# Altium PCB PreCharge.PcbDoc
Units mm, origin at the board's own origin, x right, y up, seen from the top; angles counter-clockwise.
Board outline 50 x 50 mm, 4 copper layers (Top Layer, Internal Plane 1, Internal Plane 2, Bottom Layer), stack 0.462 mm thick; 58 components, 33 nets, 166 pads, 16 vias.
Unrouted connection lines stored in the file: 2.
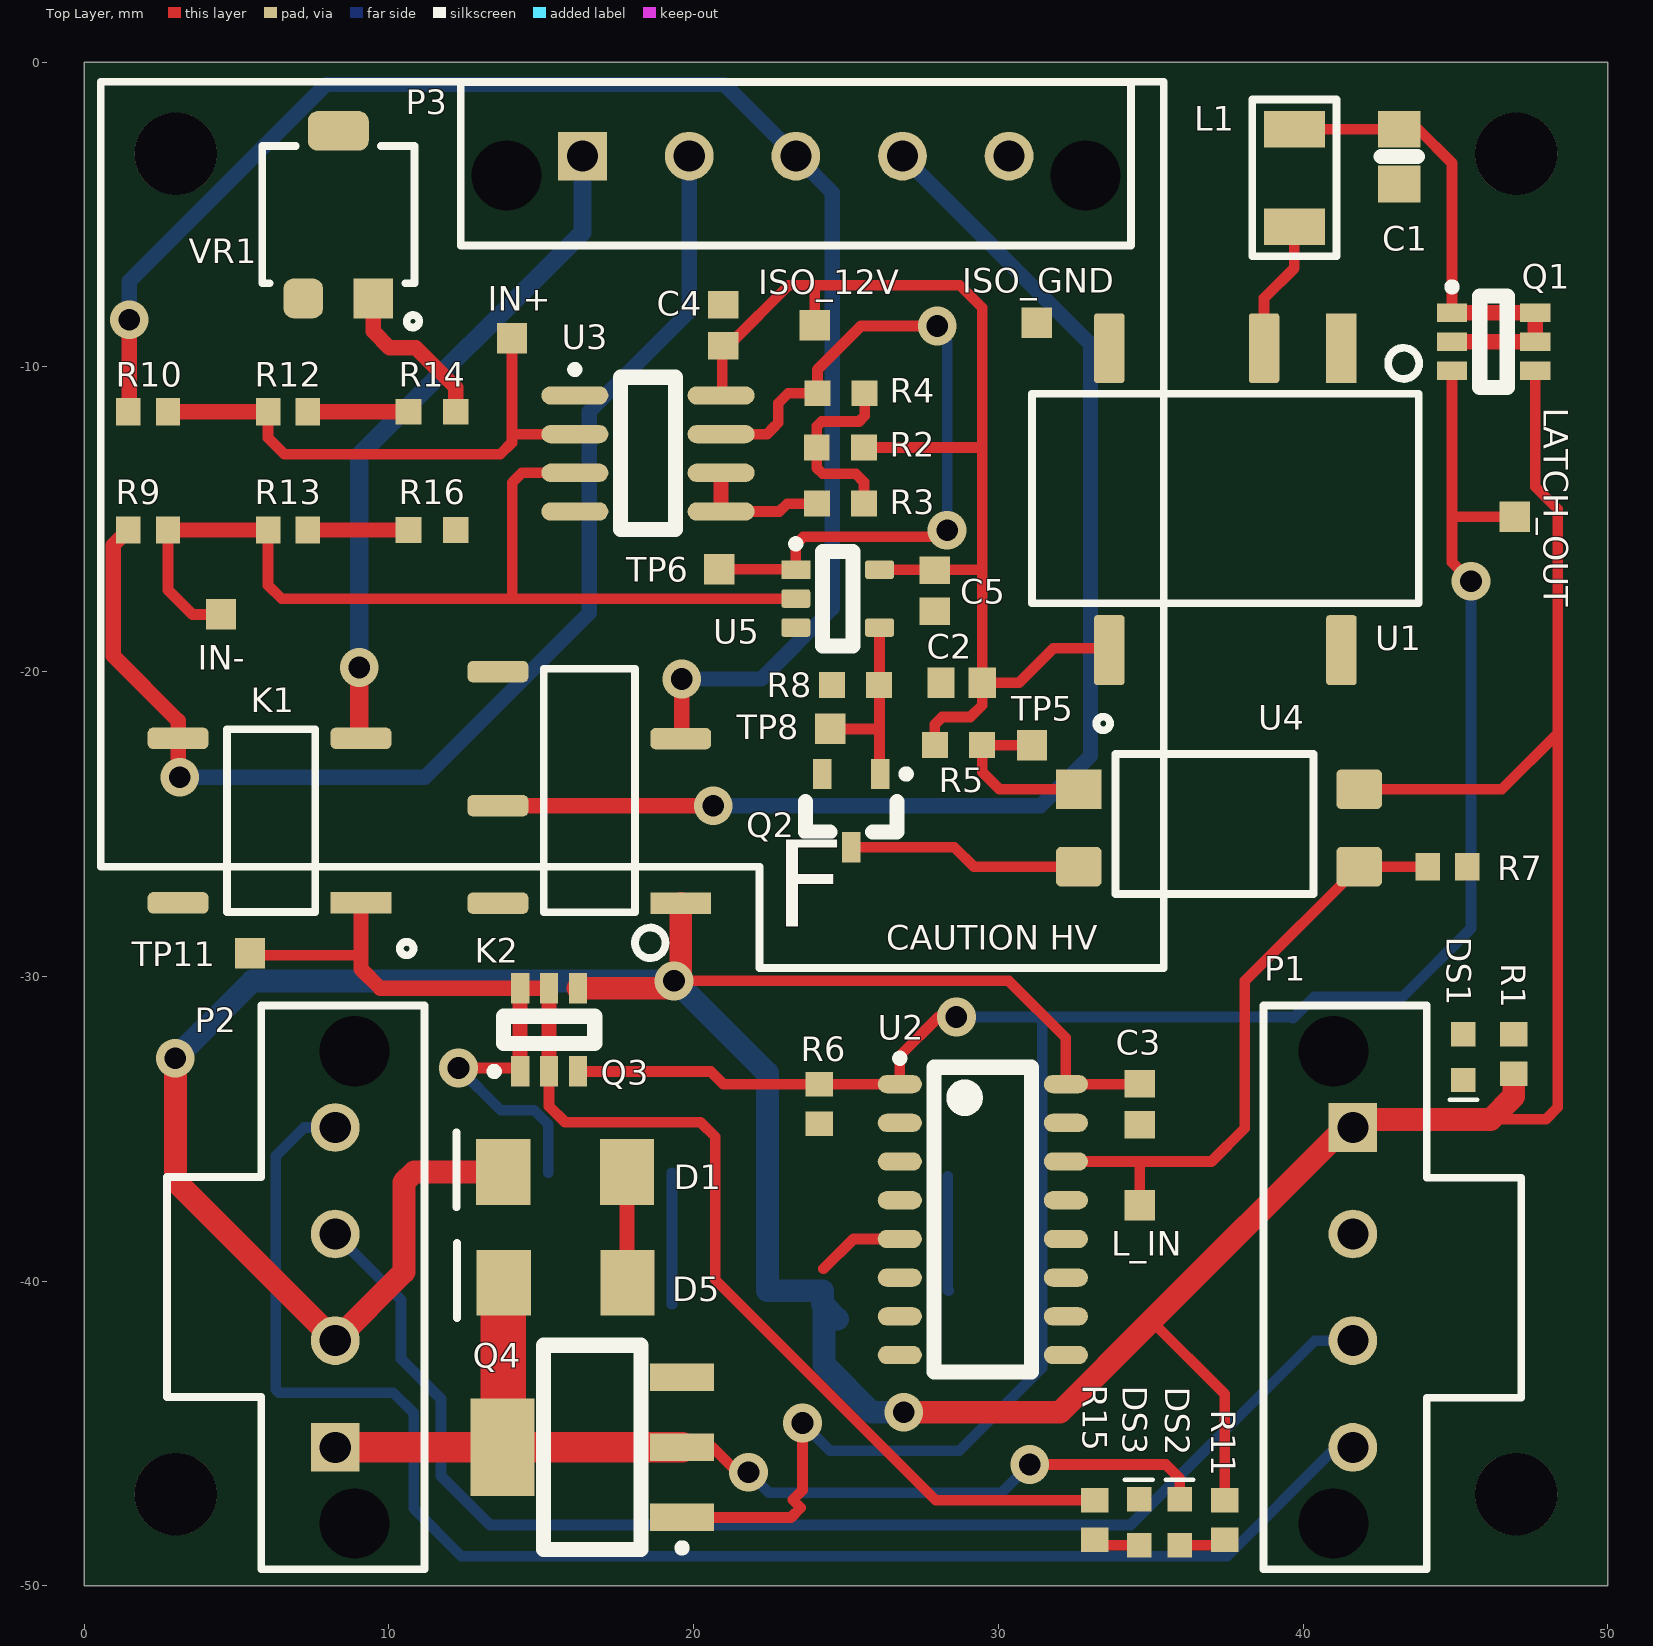
[diagram p0: Top Layer view]
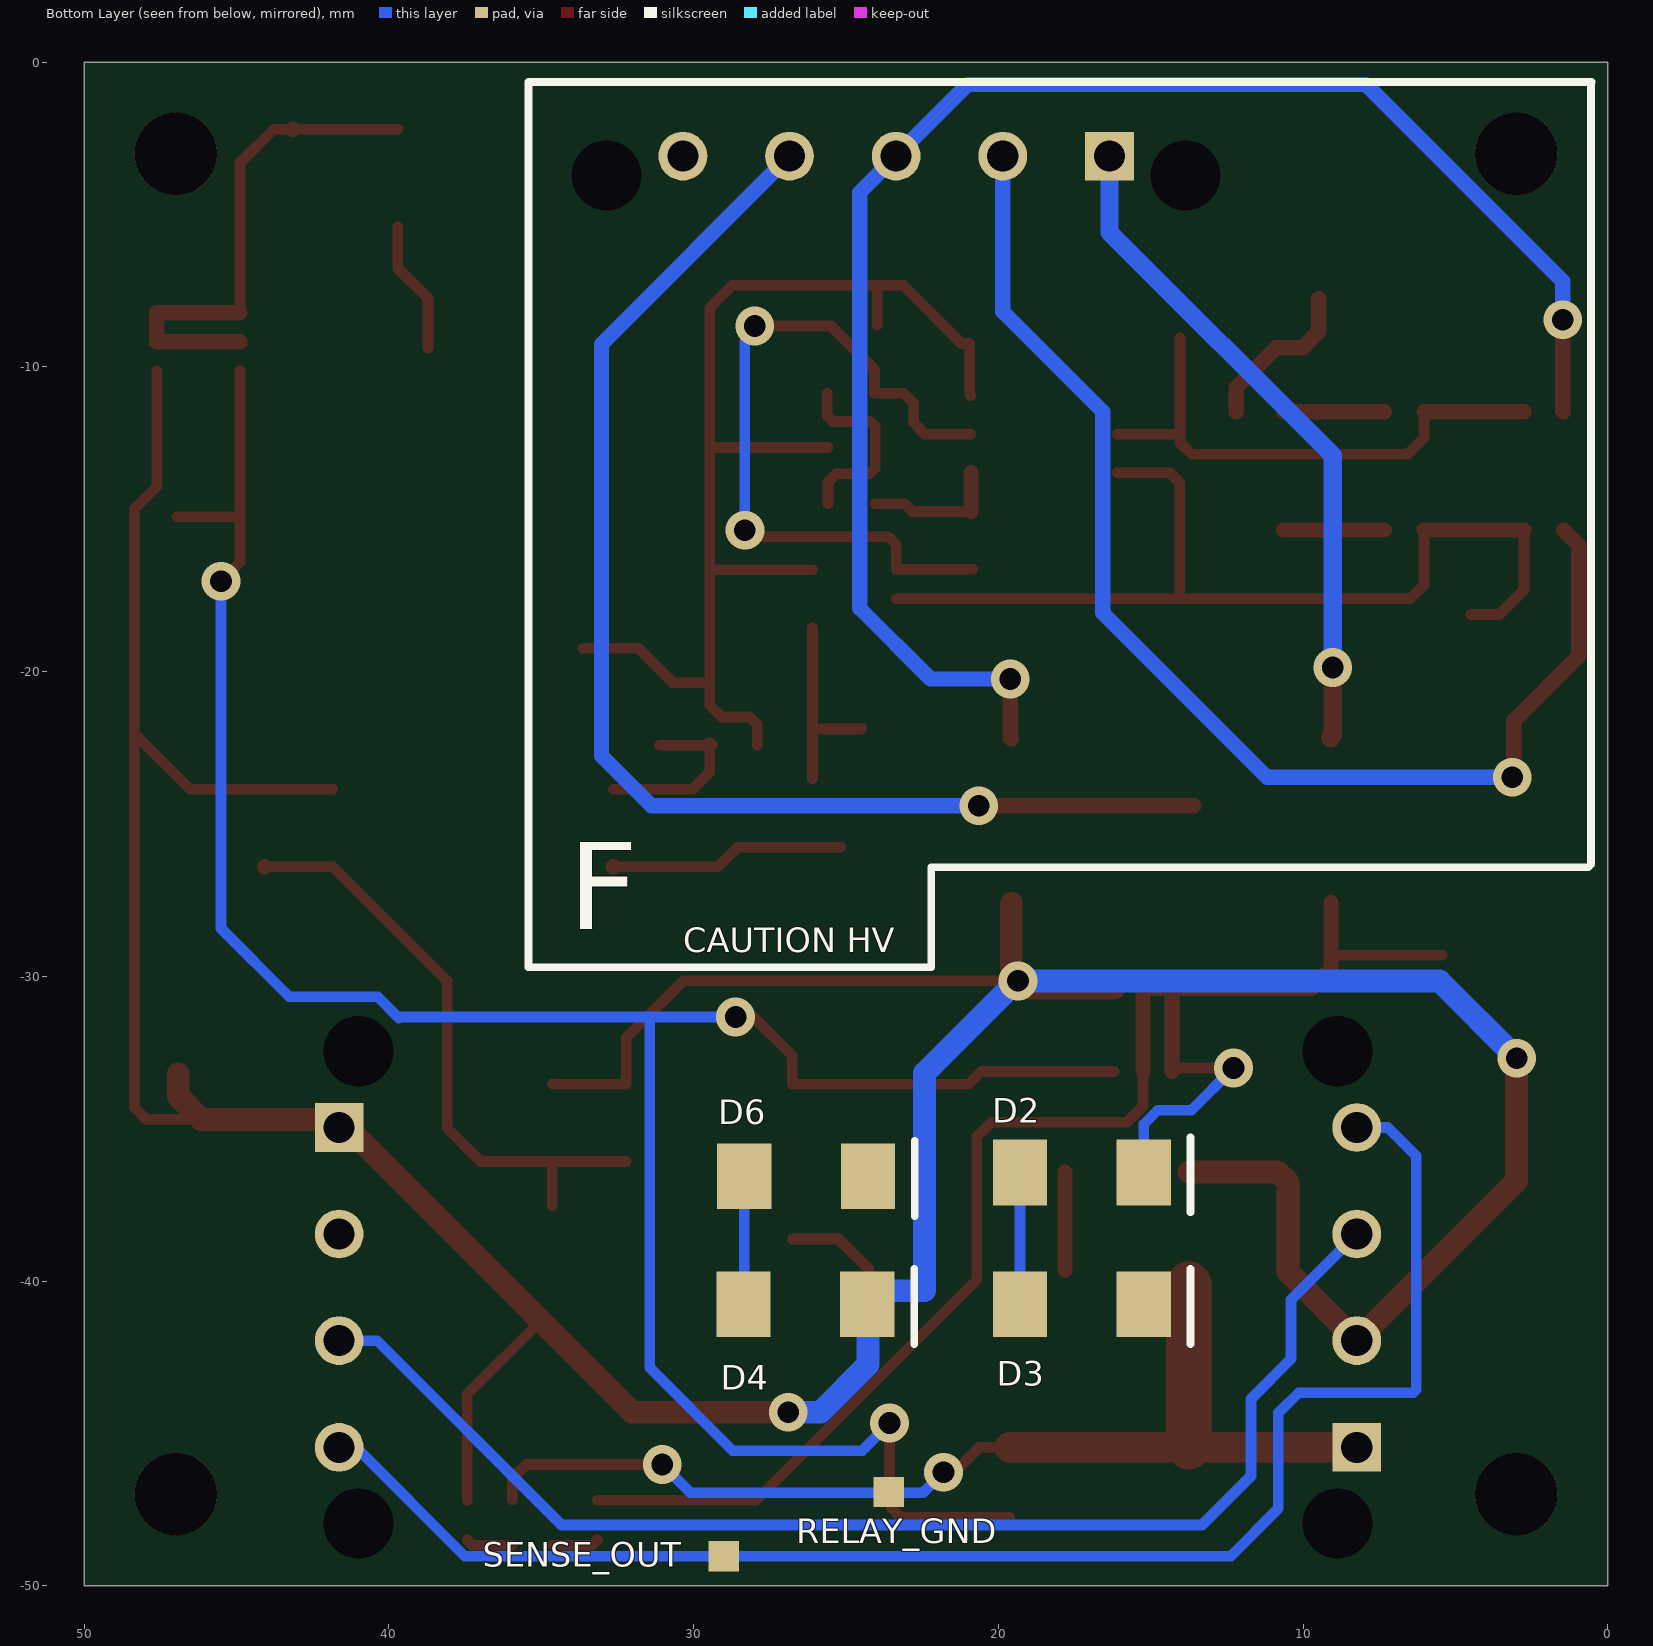
[diagram p1: Bottom Layer view, seen from below]
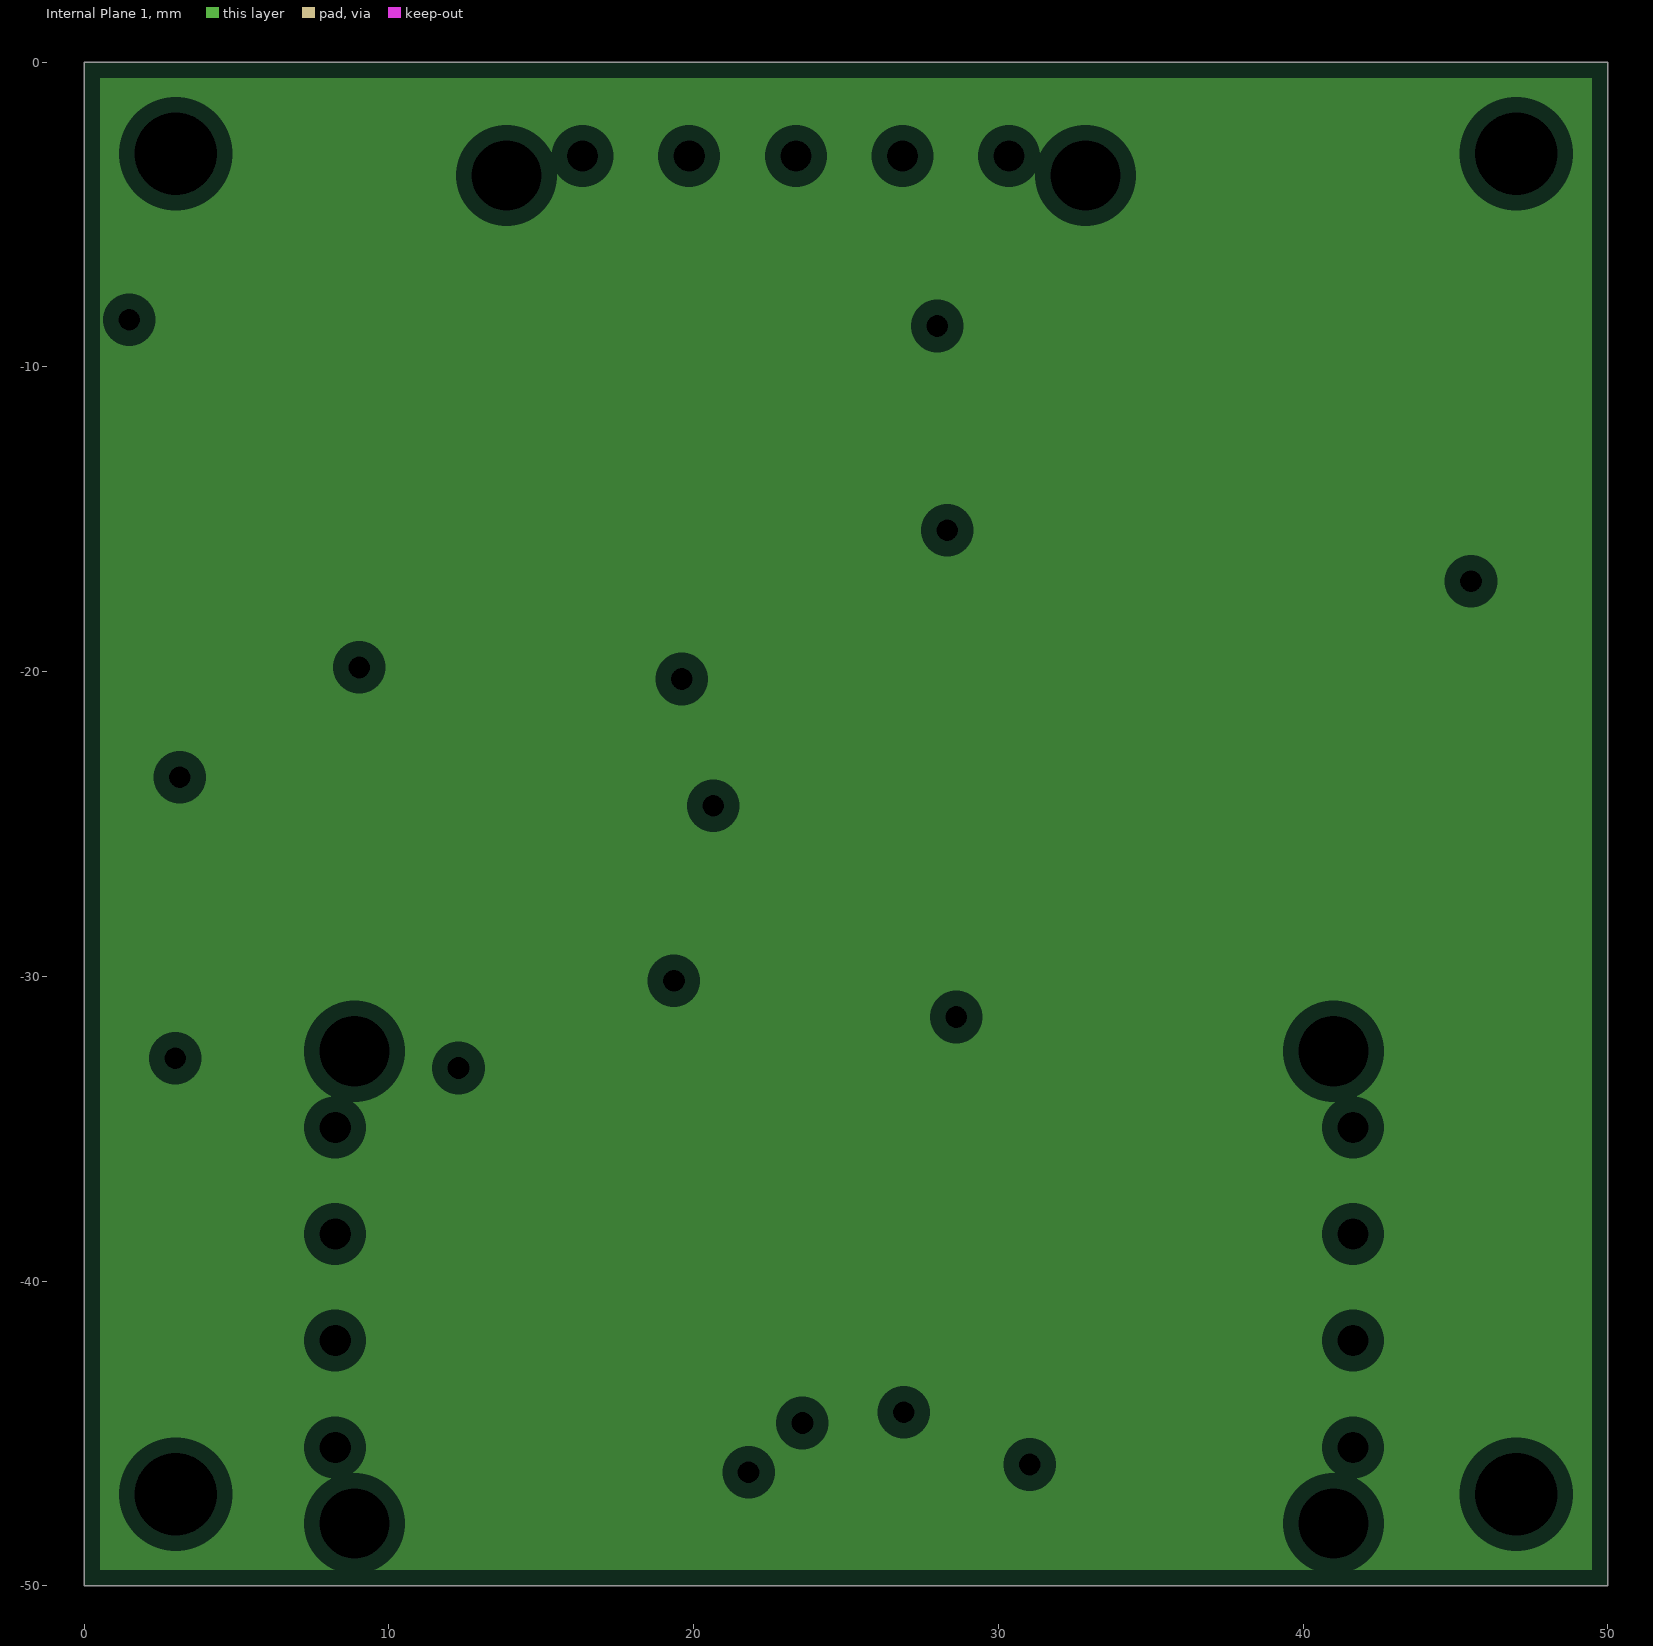
[diagram p2: Internal Plane 1, clearances drawn from the general rule]
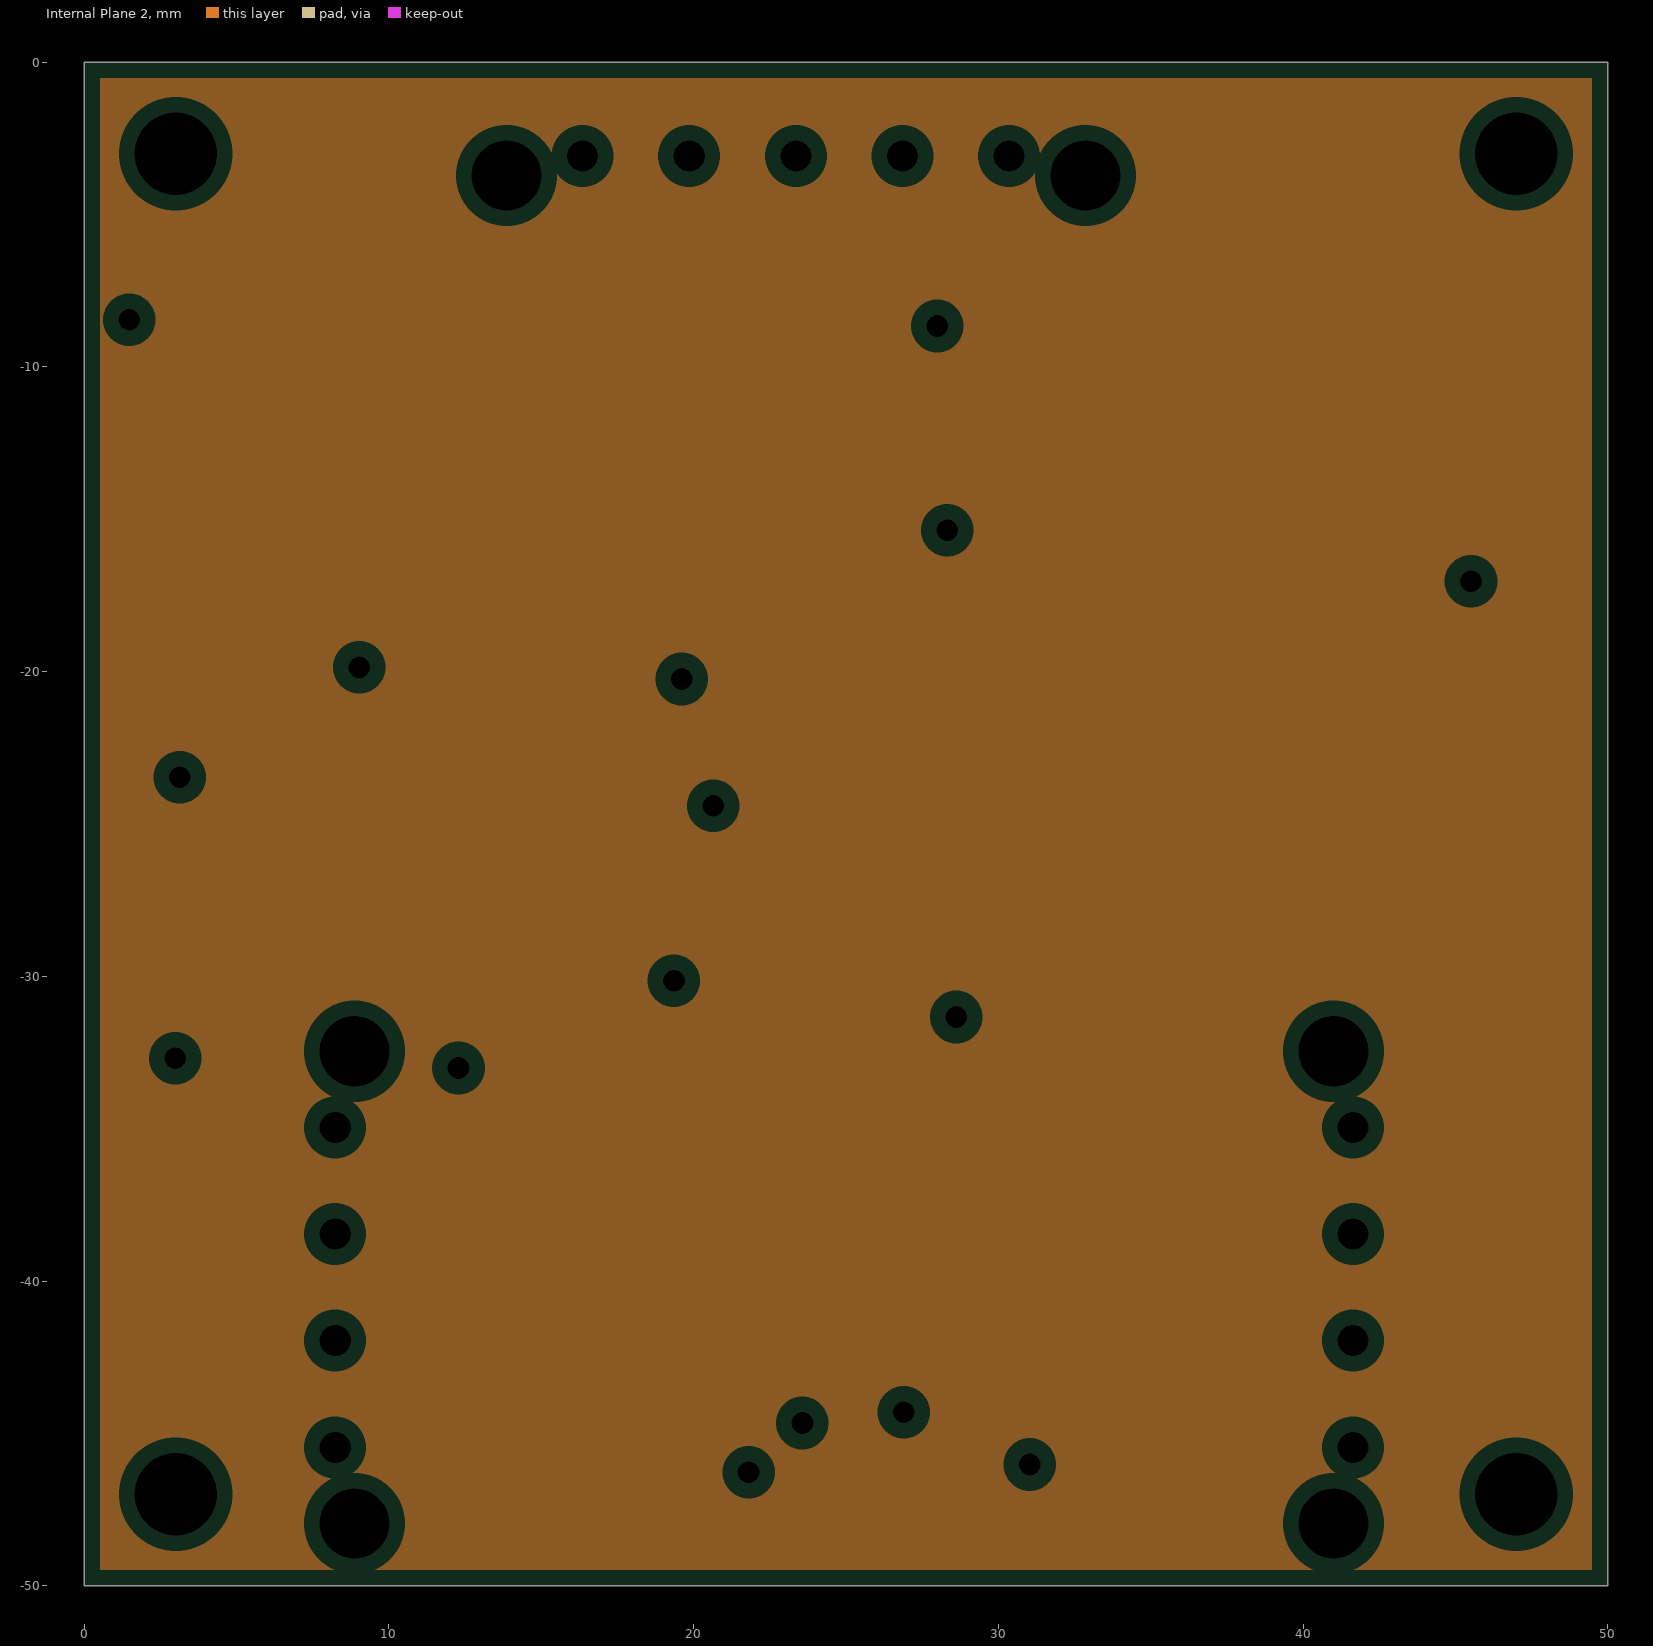
[diagram p3: Internal Plane 2, clearances drawn from the general rule]
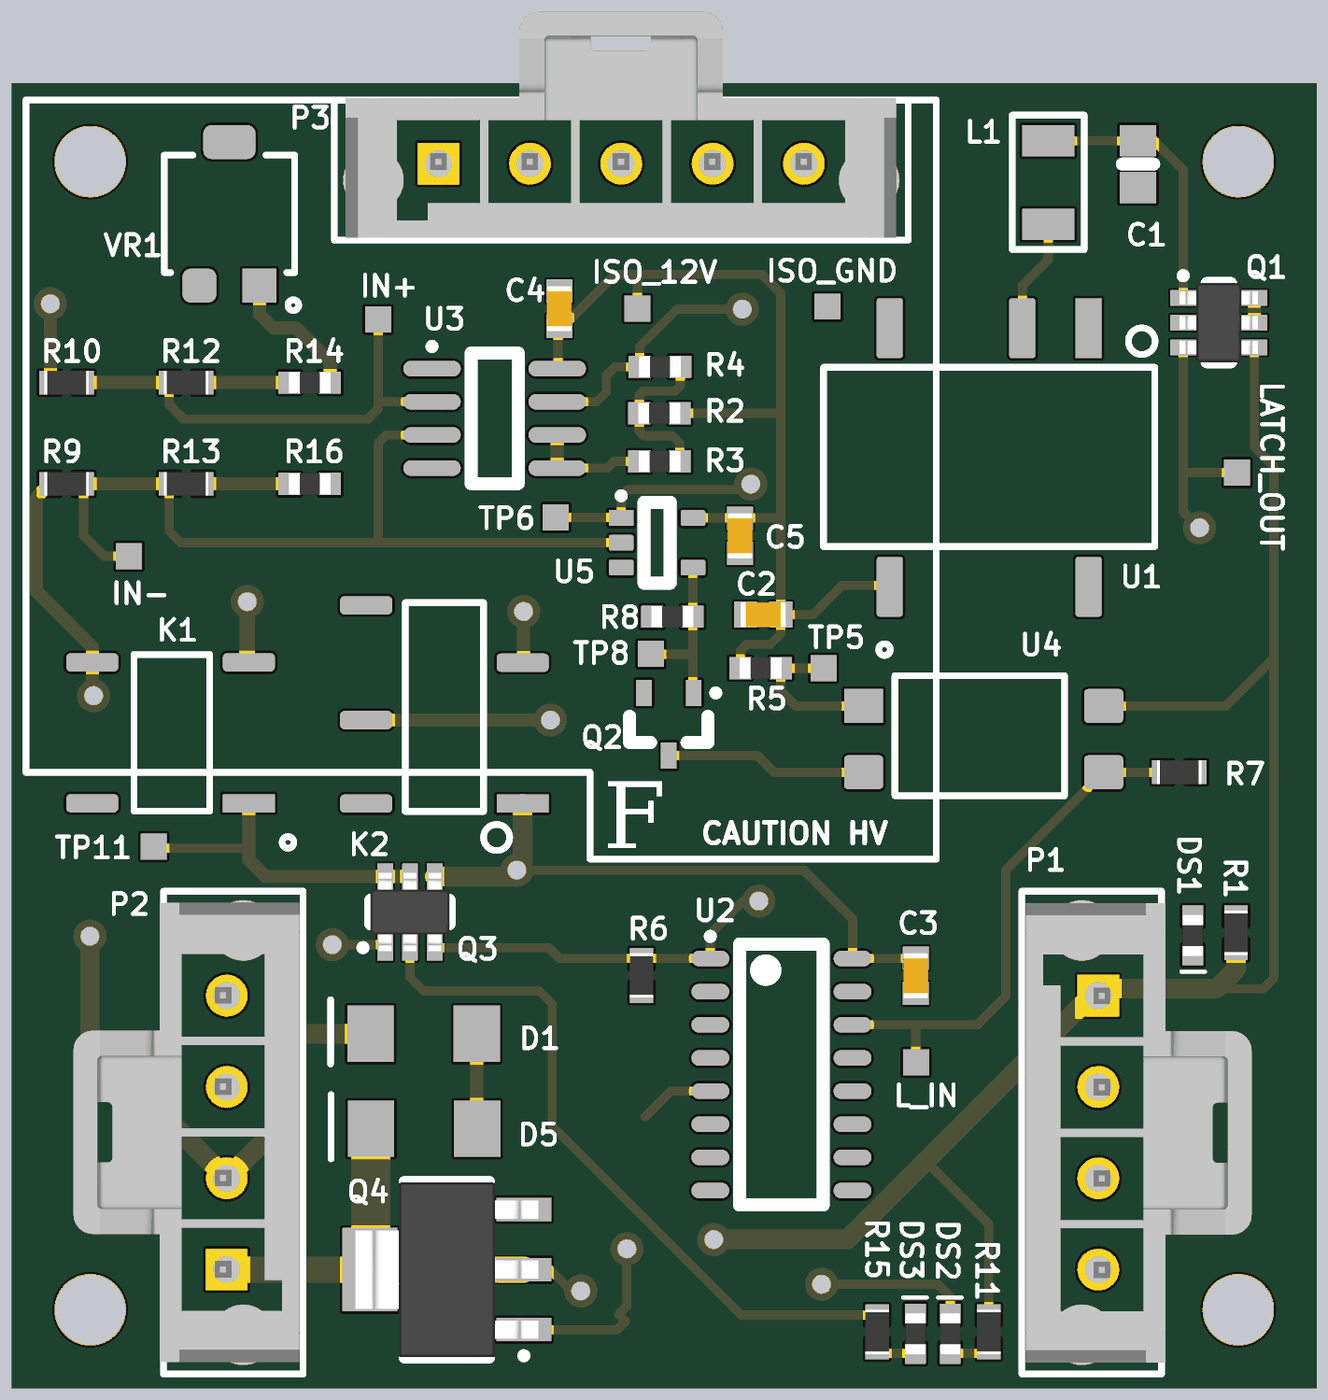
[diagram p4: 3D render of the assembled board from above, using the file's embedded part models]

## Layer stack, top to bottom
Top Solder: solder mask 0.0102, Solder Resist, Dk 3.5
Top Layer: signal copper 0.0356
Internal Plane 1: plane copper 0.0356
Internal Plane 2: plane copper 0.0356
Dielectric 1: dielectric 0.32, FR-4, Dk 4.8
Bottom Layer: signal copper 0.0356
Bottom Solder: solder mask 0.0102, Solder Resist, Dk 3.5

## Board outline
0,-50 50,-50 50,0 0,0

## Design rules (kind name [scope] priority, off if disabled: settings)
Clearance Clearance_1 [InPolygon and InNet('ISO_GND') vs InNet('TO DISCHARGE RESISTOR') or InNet('PRECHARGEIN')or InNet('PRECHARGEOUT') or InNet('BAT_IN')] p1: gap=0.5
Clearance [All] p2: gap=0.2 except(0.3: Poly-Poly Poly-Region Poly-Text)
MinimumSolderMaskSliver [All] p1: minsoldermaskwidth=0.3
PlaneClearance [All] p1: clearance=0.508
PlaneConnect [All] p1: planeconnectstyle=Relief reliefexpansion=0.508 reliefentries=4 reliefconductorwidth=0.254 reliefairgap=0.254
PolygonConnect [All] p1: connectstyle=Relief reliefconductorwidth=0.254 reliefentries=4 polygonreliefangle="90 Angle" airgapwidth=0.254
RoutingVias [All] p1: holewidth=0.3 width=1 viastyle="Through Hole" minholewidth=0.711 minwidth=1.27 maxholewidth=0.711 maxwidth=1.27
SolderMaskExpansion [All] p1: expansion=0.102
Width [All] p1: maxlimit=1.5 minlimit=0.2 preferedwidth=0.35
27 further rules are at their usual default settings.

## Components (designator, comment, footprint, x,y, rotation, side; value= is the part's Value field where it differs from the comment)
C1 "4.7uF" 0805 43.156,-3.091 r90 top
C2 "2.2uF" CAPC1608X06N 28.793,-20.362 r0 top
C3 "0.1uF" CAPC1608X06N 34.641,-34.196 r90 top
C4 "0.1uF" CAPC1608X06N 20.976,-8.633 r270 top
C5 "0.1uF" CAPC1608X06N 27.906,-17.34 r90 top
D1 "Diode" "DO-214AA DIODE" 17.813,-36.421 r180 top
D2 "Diode" "DO-214AA DIODE" 19.291,-36.442 r180 bottom
D3 "Zener Diode" "DO-214AA DIODE" 19.291,-40.763 r180 bottom
D4 "Diode" "DO-214AA DIODE" 28.364,-40.763 r180 bottom
D5 "Zener Diode" "DO-214AA DIODE" 17.831,-40.058 r180 top
D6 "Zener Diode" "DO-214AA DIODE" 28.342,-36.561 r180 bottom
DS1 "LED BLUE" LED_0603 45.246,-31.954 r270 top
DS2 "LED_GREEN" LED_0603 35.97,-48.619 r90 top
DS3 "LED_RED" LED_0603 34.636,-48.619 r90 top
IN+ "Test Point" "TEST POINT" 14.037,-9.049 r90 top (schematic designator TP7)
IN- "Test Point" "TEST POINT" 4.486,-18.121 r90 top (schematic designator TP9)
ISO_12V "Test Point" "TEST POINT" 23.971,-8.628 r90 top (schematic designator TP1)
ISO_GND "Test Point" "TEST POINT" 31.254,-8.553 r90 top (schematic designator TP2)
K1 "Relay-SPST" RELAY-SPST 9.08,-27.588 r90 top
K2 "Relay-SPDT" RELAY_SPDT 13.576,-24.4 r90 top
L1 "6.8uH" "NLFV32T-6R8M-EF/IND 6.8UH" 39.718,-2.198 r270 top
L_IN "Test Point" "TEST POINT" 34.649,-37.517 r270 top (schematic designator TP4)
LATCH_OUT "Test Point" "TEST POINT" 46.952,-14.917 r90 top (schematic designator TP3)
P1 "4POS ULTRA-FIT KEY-B" "4 POS ULTRA-FIT" 41.635,-40.209 r270 top
P2 "4POS ULTRA-FIT KEY-A" "4 POS ULTRA-FIT" 8.235,-40.209 r90 top
P3 "HV Connector" "5 POS ULTRA-FIT" 13.854,-3.709 r0 top
Q1 "MOSFET-P" P-MOSFET 46.255,-9.17 r0 top
Q2 "MOSFET-N" "N-CH MOSFET SOT-23" 25.174,-24.559 r270 top
Q3 "MOSFET-P" P-MOSFET 15.254,-31.757 r90 top
Q4 "N-MOSFET" "BUK9880 N-MOSFET 7A" 16.67,-45.46 r180 top
R1 "2K" RES_0603 46.918,-32.553 r270 top
R2 "100R" RESC1608X06N 24.815,-12.644 r0 top
R3 "33K" RESC1608X06N 24.818,-14.486 r180 top
R4 "6.8k" RESC1608X06N 24.838,-10.863 r0 top
R5 "820 Ohm" RESC1608X06N 28.693,-22.41 r180 top
R6 "10K" RES_0603 24.127,-34.189 r90 top
R7 "10K" RES_0603 44.74,-26.397 r180 top
R8 "10K" RESC1608X06N 25.311,-20.435 r0 top
R9 "470K" RES_0603 2.097,-15.349 r180 top
R10 "470K" RES_0603 2.097,-11.469 r180 top
R11 "2K" RES_0603 37.437,-47.846 r270 top
R12 "33K" RES_0603 6.681,-11.469 r180 top
R13 "33K" RES_0603 6.681,-15.349 r180 top
R14 "0R" RESC1608X06N 11.415,-11.469 r180 top
R15 "2K" RES_0603 33.159,-47.846 r270 top
R16 "0R" RESC1608X06N 11.415,-15.349 r180 top
RELAY_GND "Test Point" "TEST POINT" 23.594,-46.925 r90 bottom (schematic designator TP12)
SENSE_OUT "Test Point" "TEST POINT" 29.007,-49.033 r90 bottom (schematic designator TP10)
TP5 "Test Point" "TEST POINT" 31.105,-22.411 r90 top
TP6 "Test Point" "TEST POINT" 20.846,-16.634 r90 top
TP8 "Test Point" "TEST POINT" 24.483,-21.867 r270 top
TP11 "Test Point" "TEST POINT" 5.438,-29.248 r90 top
U1 "12V-12V Isolated DCDC" "1470-2950-1-ND/ISOLATED DCDC" 41.262,-10.532 r180 top
U2 "SR LATCH" CD4043BDR-16SOIC 29.491,-37.984 r0 top
U3 "COMPARATOR" SOIC8 18.494,-12.868 r0 top
U4 "OPTOISOLATOR" "FOD817DS OPTOISOLATOR" 41.842,-26.4 r90 top
U5 "AND Gate" "2-INPUT AND GATE" 24.727,-17.604 r0 top
VR1 "2k 0.25W Pot" "20K POT" 8.336,-2.25 r270 top

## Footprints (in the part's own frame and the unit in brackets; to place one, negate y for a bottom-side part, rotate by r counter-clockwise, add the part's x,y. Pads: shape width x height; smd on the part's side, far side on the other; paste and mask are expansions set on the pad)
"2-INPUT AND GATE" [mm] "IC GATE AND 1CH 2-INP 5-SSOP"
  rect 0.95x0.6 smd: 1(-1.375,0.95)
  rrect25% 0.95x0.6 smd: 2(-1.375,0) 3(-1.375,-0.95) 4(1.375,-0.95) 5(1.375,0.95)
  silkscreen extent -1.5,-1.55 0.5,1.92, body extent -0.9,-1.55 0.9,1.55, height 1.25
"4 POS ULTRA-FIT" [mm]
  rect 1.6x1.6 hole 1.02: 1(-5.25,0)
  round 1.6 hole 1.02: 2(-1.75,0) 3(1.75,0) 4(5.25,0)
  round 0 hole 2.3: ""(-7.75,-0.63) ""(7.75,-0.63)
  silkscreen extent -9.25,-2.93 9.25,5.53, body extent -8.79,-2.78 8.81,5.88, height 8.05
"5 POS ULTRA-FIT" [mm]
  rect 1.6x1.6 hole 1.02: 1(2.5,0.63)
  round 1.6 hole 1.02: 2(6,0.63) 3(9.5,0.63) 4(13,0.63) 5(16.5,0.63)
  round 0 hole 2.3: ""(0,0) ""(19,0)
  silkscreen extent -1.5,-2.3 20.5,3.05, body extent -1.06,-2.21 20.04,6.45, height 8.05
"20K POT" [mm]
  rect 1.3x1.3 smd: 1(5.5,1.15)
  rrect50% 1.3x2 smd: 2(0,0)
  rrect50% 1.3x1.3 smd: 3(5.5,-1.15)
  silkscreen extent 0.5,-2.5 6.46,2.66
0805 [mm]
  rect 1.2x1.4 smd: 1(-0.903,-0.001) 2(0.897,-0.001)
  silkscreen extent 0,-0.6 0,0.6, body extent -1.08,-0.7 1.07,0.7, height 0.7
"1470-2950-1-ND/ISOLATED DCDC" [mm]
  rect 1x2.29 smd: 1(0,-1.15)
  rrect20% 1x2.29 smd: 2(2.54,-1.15) 4(7.62,-1.15) 5(7.62,8.76) 8(0,8.76)
  silkscreen extent -2.55,-1.16 10.16,7.22, body extent -2.54,0.35 10.16,7.22, height 7
"BUK9880 N-MOSFET 7A" [mm] "SOT223, 4-Leads, Body 6.50x7.00mm (avg), Pitch 2.30mm, IPC Medium Density"
  rect 2.1x0.9 smd: 1(-2.95,2.3) 2(-2.95,0) 3(-2.95,-2.3)
  rect 2.1x3.2 smd: 4(2.95,0)
  silkscreen extent -3.08,-3.35 1.6,3.42, body extent -3.5,-3.35 3.5,3.35, height 1.8
CAPC1608X06N [mm] "Chip Capacitor, 2-Leads, Body 1.60x0.81mm, IPC Medium Density"
  rect 0.9x1 smd mask+0.076: 1(-0.675,0) 2(0.675,0)
  body extent -0.87,-0.48 0.87,0.48, height 0.9
CD4043BDR-16SOIC [mm] "SR LATCH"
  oval 1.45x0.6 smd: 1(-2.725,4.445) 2(-2.725,3.175) 3(-2.725,1.905) 4(-2.725,0.635) 5(-2.725,-0.635) 6(-2.725,-1.905) 7(-2.725,-3.175) 8(-2.725,-4.445) 9(2.725,-4.445) 10(2.725,-3.175) 11(2.725,-1.905) 12(2.725,-0.635) 13(2.725,0.635) 14(2.725,1.905) 15(2.725,3.175) 16(2.725,4.445)
  silkscreen extent -2.85,-5 1.6,5.42, body extent -2,-5 2,5, height 1.75
"DO-214AA DIODE" [mil] "Zener Diode 16V 5W SMBJ5353B-TP"
  rect 70x85 smd: 1(0,0) 2(160,0)
  silkscreen extent 220,-51 220,46
"FOD817DS OPTOISOLATOR" [mm]
  rect 1.3x1.5 smd: 1(2.54,9.2)
  rrect25% 1.3x1.5 smd: 2(0,9.2) 3(0,0) 4(2.54,0)
  silkscreen extent -0.9,1.5 4.92,8.62, body extent -0.9,1.5 3.7,8, height 3.5
LED_0603 [mm]
  rect 0.8x0.8 smd: 1(-0.05,0.01) 2(1.45,0.01)
  silkscreen extent 2.09,-0.43 2.09,0.48, body extent -0.1,-0.39 1.5,0.41, height 0.55
"N-CH MOSFET SOT-23" [mm] "SI2318CDS-T1-GE3CT-ND"
  rect 1x0.6 smd: 1(-1.2,0.95) 2(-1.2,-0.95) 3(1.2,0)
  silkscreen extent -1.32,-1.5 0.7,1.93, body extent -0.7,-1.52 0.7,1.52, height 1.12
"NLFV32T-6R8M-EF/IND 6.8UH" [mm]
  rect 1.2x2 smd: 1(0,0) 2(3.2,0)
  silkscreen extent -0.98,-1.38 4.17,1.38, body extent -0.98,-1.38 4.17,1.38, height 2.2
P-MOSFET [mm] "SOT23, 6-Leads, Body 2.93x2.80mm, Pitch 0.95mm, IPC Medium Density"
  rect 1x0.6 smd mask+0.076: 1(-1.365,0.95) 2(-1.365,0) 3(-1.365,-0.95) 4(1.365,-0.95) 5(1.365,0) 6(1.365,0.95)
  silkscreen extent -1.49,-1.5 0.45,1.92, body extent -1.5,-1.52 1.5,1.52, height 1.25
RELAY-SPST [mm]
  rect 0.7x2 smd: 1(0,0)
  rrect50% 0.7x2 smd: 3(5.4,0) 6(5.4,6) 8(0,6)
  silkscreen extent -1.72,-1.72 5.7,4.4, body extent -0.3,1.5 5.7,4.4, height 5.65
RELAY_SPDT [mm]
  rect 0.7x2 smd: 1(-3.2,-6)
  rrect50% 0.7x2 smd: 3(2.2,-6) 5(4.4,0) 7(0,0) 8(-3.2,0)
  silkscreen extent -5,-5.5 4.5,-1.5, body extent -3.5,-4.5 4.5,-1.5, height 5.65
RES_0603 [mm] "Chip Resistor, 2-Leads, Body 1.60x0.80mm, IPC Medium Density"
  rect 0.8x0.9 smd: 1(-0.65,0) 2(0.65,0)
  body extent -0.85,-0.45 0.85,0.45, height 0.5
RESC1608X06N [mm] "Chip Resistor, 2-Leads, Body 1.60x0.80mm, IPC Medium Density"
  rect 0.85x0.85 smd: 1(-0.775,0) 2(0.775,0)
  body extent -0.8,-0.4 0.8,0.4, height 0.55
SOIC8 [mm]
  oval 2.2x0.6 smd: 1(-2.394,1.935) 2(-2.394,0.665) 3(-2.394,-0.605) 4(-2.394,-1.875) 5(2.406,-1.875) 6(2.406,-0.605) 7(2.406,0.665) 8(2.406,1.935)
  silkscreen extent -2.52,-2.47 0.91,2.91, body extent -1.99,-2.47 2.01,2.53, height 1.75
"TEST POINT" [mm]
  rect 1x1 smd: TP(0,0)

## Part data
C1: library part "CAP CER 4.7UF 25V 10% X5R 0603", "4.7µF ±10% 50V Ceramic Capacitor X5R 0805 (2012 Metric)"
C2: library part "CAP CER 2.2UF 25V 10% 0603", "CAP CER 2.2UF 50V X5R 0603"
C3 C4 C5: library part "CAP CER 0.1UF 50V 10% X7R 0603", "0.10µF ±10% 50V Ceramic Capacitor X7R 0603 (1608 Metric)"
D1 D2 D4: "Diode Schottky 40V 3A Surface Mount DO-214AA (SMB)"
D3 D5 D6: "Zener Diode 16V 5W ±5% Surface Mount DO-214AA (SMB)"
DS1: library part LED_BLUE, "LED BLUE CLEAR 0603 SMD"
DS2: "LED GREEN CLEAR 0603 SMD"
DS3: "Red LED 0603"
K1: "Telecom Relay SPST-NO (1 Form A) Surface Mount"
K2: "Telecom Relay SPDT (1 Form C) Surface Mount"
L1: library part "IND 6.8uH", "6.8µH Shielded Wirewound Inductor 260mA 204 mOhm Max 1210 (3225 Metric)"
P1 P2: library part "4 Position Vertical Ultra-Fit", "4 Positions Header Connector 0.138\" (3.50mm) Through Hole Tin"
P3: library part "5 Position Vertical Ultra-Fit", "5 Positions Header Connector 0.138\" (3.50mm) Through Hole Tin"
Q1 Q3: "MOSFET P-CH 30V 4A SOT23-6"
Q2: "MOSFET N-CH 50V 200MA SOT23-3"
Q4: library part "MOSFET-N High Current", "MOSFET N-CH 55V 7A SOT223"
R1 R5 R11 R15: library part "RES SMD 820 OHM 5% 1/4W 0603", "RES SMD 820 OHM 5% 1/4W 0603"
R2: library part "RES 6.8k OHM 1% 1/10W 0603 SMD", "RES SMD 100 OHM 1% 1/10W 0603"
R3 R12 R13: library part "RES 33K OHM 1% 1/4W 0603", "RES 33K OHM 1% 1/4W 0603"
R4: library part "RES 6.8k OHM 1% 1/10W 0603 SMD", "RES SMD 6.8K OHM 1% 1/10W 0603"
R6 R7 R8: library part "RES SMD 10K OHM 1% 1/10W 0603", "RES SMD 10K OHM 1% 1/10W 0603"
R9 R10: library part "RES 470K OHM 1% 1/4W 0603", "RES SMD 470K OHM 1% 1/4W 0603"
R14 R16: library part "RES 0.0 OHM 1/4W 0603", "RES SMD 0.0 OHM JUMPER 1/4W 0603"
U1: library part "12V 84mA Isolated DC/DC", "Isolated Module DC DC Converter 1 Output 12V 84mA 10.8V - 13.2V Input"
U2: library part "CD4043B SR Latch", "S-R Latch 4 Channel 1:1 IC Tri-State 16-TSSOP"
U3: library part "LM311 Comparator", "IC VOLTAGE COMPARATOR 8-SOIC"
U4: library part "FOD817 Optoisolator", "OPTOISOLATOR 5KV TRANSISTOR 4SMD"
U5: library part "2-Input AND Gate", "IC GATE AND 1CH 2-INP 5-SSOP"
VR1: library part "20k 0.25W Pot", "TRIMMER 2K OHM 0.25W SMD"

## Free pads (board coordinates)
  round 2.7 hole 2.7: ""(3,-47) ""(3,-3) ""(47,-47) ""(47,-3)

## Via types
v1: diameter 1.27, hole 0.711, Top Layer to Bottom Layer, tented both sides, 16 vias

## Nets (pads, with @x,y where several pads share a name; then routed paths per layer and width w, separated by ;. In a path a pad name is that pad's centre, name@x,y a point inside that pad or via, vN(x,y) a via of type N, cw(c..) or ccw(c..) an arc to the next point about the centre after c; other vN are vias at no path point)
+12V: C3.2 D1.2 D4.2 K2.1 P1.1 P2.2 Q1.4 Q3.4 R1.2 R11.1 U2.5 U2.16 U4.4 | length 150.5
  Top Layer w0.35: v1(19.352,-30.15) 19.395,-30.15 30.347,-30.15 32.216,-32.019 U2.16 34.623,-33.539 C3.2 ; 24.263,-39.602 25.246,-38.619 U2.5 ; 35.023,-41.308 37.437,-43.722 R11.1 ; U4.4 46.526,-23.86 48.358,-22.028 ; 46.162,-34.696 47.964,-34.696 48.358,-34.302 48.358,-22.028 ; Q1.4 47.62,-13.93 48.358,-14.668 48.358,-22.028
  Top Layer w0.75: v1(2.989,-32.684) 2.989,-36.713 P2.2 10.487,-39.707 10.487,-36.763 10.829,-36.421 D1.2 ; Q3.4 19.153,-30.392 v1@19.373,-30.172 ; v1@19.395,-30.15 19.576,-29.969 K2.1 ; v1(26.899,-44.308) 32.023,-44.308 35.023,-41.308 41.372,-34.959 P1.1 41.898,-34.696 46.162,-34.696 46.918,-33.94 R1.2
  Bottom Layer w0.75: v1(2.989,-32.684) 5.523,-30.15 v1(19.352,-30.15) ; v1@19.373,-30.129 22.422,-33.178 22.422,-40.321 24.234,-40.321 24.234,-40.763 D4.2@24.283,-40.812 ; D4.2@24.283,-40.799 D4.2@24.283,-40.812 ; D4.2@24.722,-41.251 D4.2@24.283,-40.812 ; v1(26.899,-44.308) 25.84,-44.308 24.283,-42.751 D4.2@24.283,-40.812
BAL/STR: R3.2 U3.5 U3.6 | length 4.5
  Top Layer w0.35: U3.5 22.81,-14.743 23.067,-14.486 R3.2
  Top Layer w0.5: U3.5 U3.6
BAT_IN: K1.3 P3.1 | length 22.2
  Top Layer w0.6: v1(9.022,-19.861) 9.022,-22.078 9.106,-22.162 K1.3
  Bottom Layer w0.6: v1(9.022,-19.861) 9.022,-12.911 16.354,-5.579 P3.1
GND: C1.1 C3.1 D3.2 D6.2 DS1.2 DS3.2 K1.8 K2.8 P1.2 Q4.3 R6.1 R7.1 U1.1 U2.3 U2.4 U2.6 U2.7 U2.8 U2.12 U2.15
IN+: IN+.TP R10.1 R12.2 U3.2 | length 18
  Top Layer w0.35: R12.2 6.031,-12.326 6.569,-12.864 13.654,-12.864 14.037,-12.481 14.037,-12.203 ; IN+.TP 14.037,-12.203 ; U3.2 14.037,-12.203
  Top Layer w0.5: R10.1 R12.2
IN-: IN-.TP R9.1 R13.2 U3.3 U5.2 | length 32.6
  Top Layer w0.35: R9.1 2.747,-17.319 3.549,-18.121 IN-.TP ; R13.2 6.031,-17.16 6.475,-17.604 14.043,-17.604 ; U3.3 14.364,-13.473 14.043,-13.794 14.043,-17.604 ; U5.2 14.043,-17.604
  Top Layer w0.5: R9.1 R13.2
ISO_12V: C2.2 C4.2 C5.2 ISO_12V.TP R2.2 R5.2 U1.5 U3.8 U5.5 | length 40.1
  Top Layer w0.35: U3.8 20.933,-10.9 20.933,-9.231 21.21,-9.231 23.122,-7.319 23.95,-7.319 ; ISO_12V.TP 23.971,-7.34 23.95,-7.319 ; R2.2 29.452,-12.644 29.468,-12.628 ; U5.5 29.429,-16.654 ; R5.2 27.918,-21.735 28.164,-21.489 29.081,-21.489 29.468,-21.102 C2.2 ; U1.5@33.642,-19.234 31.808,-19.234 30.68,-20.362 C2.2 ; 23.95,-7.319 28.734,-7.319 29.468,-8.053 29.468,-12.628 ; C2.2 29.468,-12.628
ISO_GND: C2.1 C4.1 C5.1 ISO_GND.TP P3.5 Q2.2 R8.1 R16.1 U1.4 U3.1 U3.4 U5.3 VR1.2 VR1.3
LATCH_IN: L_IN.TP R7.2 U2.14 U4.3 | length 20.2
  Top Layer w0.35: U2.14 34.637,-36.079 ; L_IN.TP@34.637,-37.534 34.637,-36.079 ; R7.2@44.087,-26.4 U4.3 38.092,-30.15 38.092,-34.986 36.999,-36.079 34.637,-36.079
  Top Layer w0.5: R7.2@44.087,-26.4 R7.2
LATCH_OUT: LATCH_OUT.TP Q1.3 Q3.3 Q4.1 R6.2 U2.1 | length 80.8
  Top Layer w0.35: Q3.3 20.564,-33.122 20.981,-33.539 R6.2 U2.1 26.766,-32.605 28.035,-31.336 v1(28.624,-31.336) ; Q4.1 23.195,-47.76 23.515,-47.44 23.254,-47.179 23.57,-46.863 v1(23.57,-44.661) ; Q1.3 44.89,-14.861 ; v1(45.516,-17.03) 44.89,-16.404 44.89,-14.861 ; LATCH_OUT.TP 44.946,-14.917 44.89,-14.861
  Bottom Layer w0.35: v1(23.57,-44.661) 24.476,-45.567 28.72,-45.567 31.446,-42.841 31.446,-31.336 ; v1(28.624,-31.336) 31.446,-31.336 ; v1(45.516,-17.03) 45.516,-28.429 43.274,-30.671 40.373,-30.671 39.675,-31.369 39.642,-31.336 31.446,-31.336
NetC1_2: C1.2 L1.1 Q1.1 Q1.2 Q1.5 Q1.6 | length 17
  Top Layer w0.35: L1.1 C1.2@43.153,-2.198 ; C1.2 43.779,-2.194 44.89,-3.305 Q1.1
  Top Layer w0.5: C1.2@43.153,-2.198 C1.2 ; Q1.2 Q1.5 Q1.6 Q1.1
NetD1_1: D1.1 D5.1 | length 3.2
  Top Layer w0.5: D5.1@17.813,-39.646 D1.1
NetD2_1: D2.1 D3.1 | length 4.3
  Bottom Layer w0.35: D3.1 D2.1
NetD2_2: D2.2 K1.1 Q3.1 Q3.2 Q3.5 Q3.6 R15.1 TP11.TP | length 52.2
  Top Layer w0.35: TP11.TP@5.438,-29.312 9.064,-29.312 ; v1(12.281,-33.008) 14.19,-33.008 Q3.1 ; Q3.2 15.254,-34.26 15.778,-34.784 20.218,-34.784 20.704,-35.27 20.704,-39.958 27.942,-47.196 R15.1
  Top Layer w0.5: K1.1 9.08,-29.758 9.714,-30.392 Q3.6 ; Q3.1 Q3.6 ; Q3.2 Q3.5 Q3.6
  Bottom Layer w0.35: v1(12.281,-33.008) 13.67,-34.397 14.768,-34.397 15.227,-34.856 D2.2
NetD4_1: D4.1 D6.1 | length 3.8
  Bottom Layer w0.35: D6.1 28.342,-40.299 D4.1@28.364,-40.321
NetDS1_1: DS1.1 R1.1
NetDS2_1: DS2.1 R11.2 | length 1.5
  Top Layer w0.35: DS2.1 37.264,-48.669 R11.2
NetDS3_1: DS3.1 R15.2 | length 1.5
  Top Layer w0.35: R15.2 33.332,-48.669 DS3.1
NetL1_2: L1.2 U1.2 | length 4.4
  Top Layer w0.35: U1.2 38.722,-7.745 39.718,-6.749 L1.2
NetQ2_1: Q2.1 R8.2 TP8.TP U5.4 | length 6.6
  Top Layer w0.35: TP8.TP 24.497,-21.881 26.102,-21.881 ; Q2.1@26.102,-23.514 26.102,-21.881 ; U5.4 26.102,-21.881
NetQ2_3: Q2.3 U4.2 | length 7.7
  Top Layer w0.35: Q2.3 28.555,-25.759 29.202,-26.406 U4.2@32.636,-26.406
  Top Layer w0.5: U4.2@32.636,-26.406 U4.2
NetR2_1: R2.1 R3.1 R4.2 | length 6.3
  Top Layer w0.35: R3.1 25.593,-13.779 25.321,-13.507 24.232,-13.507 24.04,-13.315 R2.1 24.04,-11.95 24.2,-11.79 25.427,-11.79 25.613,-11.604 R4.2
NetR4_1: R4.1 TP6.TP U3.7 U5.1 | length 24.8
  Top Layer w0.35: TP6.TP 23.332,-16.634 U5.1 23.352,-15.82 23.602,-15.57 28.104,-15.57 v1(28.318,-15.356) ; U3.7 22.409,-12.203 22.475,-12.137 22.607,-12.005 22.779,-11.833 22.779,-11.192 23.108,-10.863 R4.1 24.063,-10.081 25.491,-8.653 v1(27.993,-8.653)
  Bottom Layer w0.35: v1@27.899,-8.747 28.318,-9.166 v1(28.318,-15.356)
  Bottom Layer w0.5: v1@27.899,-8.747 v1(27.993,-8.653)
NetR5_1: R5.1 TP5.TP U4.1 | length 5.9
  Top Layer w0.35: R5.1 29.468,-23.291 30.037,-23.86 U4.1 ; R5.1 TP5.TP
  Top Layer w0.5: R5.1 R5.1
NetR12_1: R12.1 R14.2 | length 3.3
  Top Layer w0.5: R12.1 R14.2
NetR13_1: R13.1 R16.2 | length 3.3
  Top Layer w0.5: R13.1 R16.2
NetR14_1: R14.1 VR1.1 | length 5.3
  Top Layer w0.5: VR1.1 9.486,-8.839 10.018,-9.371 10.884,-9.371 12.19,-10.677 R14.1
PRECHARGEIN: K1.6 P3.2 R9.2 | length 41.3
  Top Layer w0.5: R9.2 0.946,-15.85 0.946,-19.476 3.08,-21.61 K1.6 3.08,-23.415 v1(3.131,-23.466)
  Bottom Layer w0.5: v1(3.131,-23.466) 11.175,-23.466 16.573,-18.068 16.573,-11.464 19.854,-8.183 P3.2
PRECHARGEOUT: K2.3 P3.3 R10.2 | length 53
  Top Layer w0.5: R10.2 1.472,-11.444 v1(1.472,-8.448) ; K2.3 19.61,-22.166 v1(19.61,-20.24)
  Bottom Layer w0.5: v1(1.472,-8.448) 1.472,-7.188 7.928,-0.732 21.007,-0.732 P3.3 24.55,-4.275 24.55,-17.919 22.229,-20.24 v1(19.61,-20.24)
RELAY_GND: D5.2 DS2.2 P2.1 Q4.2 Q4.4 RELAY_GND.TP | length 35
  Top Layer w0.35: Q4.2 19.622,-45.458 20.618,-45.458 21.438,-46.278 v1(21.802,-46.278) ; v1(31.03,-46.021) 35.495,-46.021 35.96,-46.486 DS2.2
  Top Layer w0.5: Q4.4@13.719,-45.459 Q4.4 Q4.4@13.749,-45.431
  Top Layer w1: P2.1 Q4.4@13.719,-45.459 ; Q4.4 Q4.2
  Top Layer w1.5: Q4.4@13.749,-45.431 D5.2@13.749,-40.115
  Bottom Layer w0.35: v1(21.802,-46.278) 22.472,-46.948 30.103,-46.948 v1(31.03,-46.021)
SENSE_IN: P1.3 P2.3 | length 42.5
  Bottom Layer w0.35: P2.3 10.393,-40.617 10.393,-42.556 11.708,-43.871 11.708,-46.399 13.316,-48.007 34.336,-48.007 40.384,-41.959 P1.3
SENSE_OUT: P1.4 P2.4 SENSE_OUT.TP | length 51.2
  Bottom Layer w0.35: P2.4 7.214,-34.959 6.278,-35.895 6.278,-43.558 6.383,-43.663 10.142,-43.663 10.81,-44.331 10.81,-47.464 12.376,-49.03 37.514,-49.03 41.085,-45.459 P1.4 P1.4@41.635,-45.196
"TO DISCHARGE RESISTOR": K2.7 P3.4 | length 42.4
  Top Layer w0.5: K2.7 v1(20.639,-24.4)
  Bottom Layer w0.5: v1(20.639,-24.4) 31.387,-24.4 33.028,-22.759 33.028,-9.253 P3.4
pads on no net: K2.5 P1. P2. P3. U1.8 U2.2 U2.9 U2.10 U2.11 U2.13

## Silkscreen, mask and mechanical layers (free items; w line width, h text height)
Top Overlay:
  lines w0.254: 0.537,-26.404 0.537,-0.64 35.429,-0.64 35.429,-29.728 22.16,-29.728 22.16,-26.404 0.537,-26.404
  text "CAUTION HV" at 26.313,-29.122 h0.8
  text "F" at 22.641,-29.302 h5
Bottom Overlay:
  lines w0.254: 0.532,-0.646 35.421,-0.646 35.421,-29.699 22.211,-29.699 22.198,-29.686 22.198,-26.416 0.636,-26.416 0.545,-26.325 0.545,-0.659 0.532,-0.646
  text "CAUTION HV" at 30.343,-29.207 h0.8
  text "F" at 34.112,-29.387 h5